# EAGLE board REGULADOR 5V y 9V (EAGLE 7.6.0)
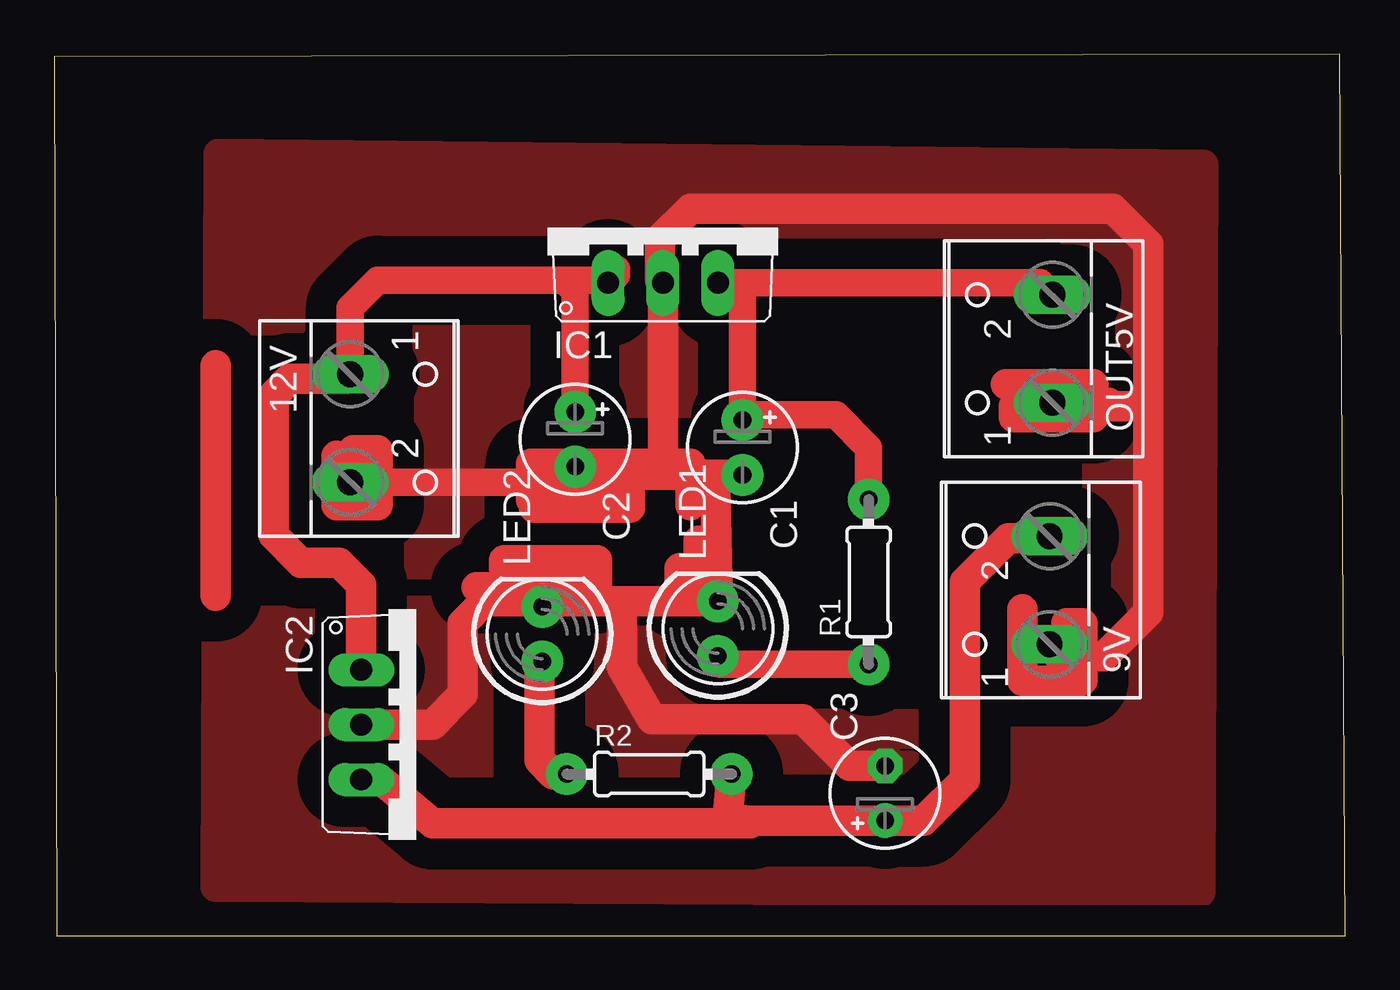
[diagram p0: board, top side]

Size 59.8 x 40.82 mm. Coordinates in mm from the lower left corner, seen from the top.
Outline: 0.13,0 59.8,0 59.54,40.82 0,40.69 0.13,0
Copper layers (1*16): Top 0.035mm / dielectric 1.5mm / Bottom 0.035mm
Design rules "default": minimum track width 10mil, minimum drill 24mil, track to track 8mil, track to pad 8mil, pad to pad 8mil, via to via 8mil, smd to smd 8mil, copper to edge 40mil, drill to drill 8mil, minimum pad ring 10mil, minimum via ring 8mil, stop-mask expansion 4mil, vias tented up to drill 0mil, thermal gap 10mil

## Footprints (pad centres in the part's own frame; a part is rotated, then mirrored left to right if it is on the bottom)
W237-102 = drill 1.194 long: 1 -2.5,-1.27; 2 2.5,-1.27
E2,5-5 = drill 0.813 pad 1.6: + -1.27,0 | drill 0.813 pad 1.6 octagon: - 1.27,0
TO220V = drill 1.016 long: 1 -2.54,-2.54; 2 0,-2.54; 3 2.54,-2.54
LED5MM = drill 0.813 octagon: A -1.27,0; K 1.27,0
0204/7 = drill 0.813 octagon: 1 -3.81,0; 2 3.81,0

## Placement (x,y rotation side)
9V  [W237-102]  44.83,16 90 top
12V  [W237-102]  14.99,23.5 270 top
C1  100uf  [E2,5-5]  31.88,22.61 270 top
C2  100uf  [E2,5-5]  24.13,22.99 270 top
C3  100uf  [E2,5-5]  38.48,6.6 90 top
IC1  7805TV  [TO220V]  28.19,32.77 0 top
IC2  7805TV  [TO220V]  16.76,9.78 270 top
LED1  [LED5MM]  30.73,14.22 90 top
LED2  [LED5MM]  22.61,13.97 90 top
OUT5V  [W237-102]  44.96,27.18 90 top
R1  270  [0204/7]  37.72,16.38 90 top
R2  270  [0204/7]  27.56,7.49 0 top

## Library data of the parts
9V 12V OUT5V = con-wago-500; MPN: 237-102; OC_FARNELL: unknown; OC_NEWARK: 70K9898
C1-C3 R1 R2 = rcl
IC1 IC2 = linear
LED1 LED2 = led

## Nets
GND: 9V.1 12V.2 C1.- C2.- C3.- IC1.2 IC2.2 LED1.K LED2.K OUT5V.1
N$1: 12V.1 C2.+ IC1.1 IC2.1
N$2: C1.+ IC1.3 OUT5V.2 R1.2
N$5: LED1.A R1.1
N$12: 9V.2 C3.+ IC2.3 R2.2
N$13: LED2.A R2.1

## Tracks (layer width: path | path; a pad name or v marks a point on that pad's centre or on a via)
GND
  Top 1.27: 12V.2 23.41,21 C2.-
  Top 1.422: C1.- 30.61,21.34 | 28.07,21.34 23.75,21.34 23.41,21 | 28.07,21.34 28.19,21.46 IC1.2 28.07,30.35 28.07,32.26 29.46,33.66 49.02,33.66 50.67,32 50.67,24.26 | 30.61,21.34 LED1.K 26.29,15.49 | 30.61,21.34 28.07,21.34 | 46.52,12.95 48.64,12.95 50.67,14.99 50.67,24.26 | 48.81,24.68 OUT5V.1 46.39,24.51 50.42,24.51 50.67,24.26 | C3.- 36.83,7.87 34.67,10.03 27.69,10.03 26.29,12.45 26.29,15.49 | 23.62,15.49 LED2.K | 26.29,15.49 23.62,15.49 | 23.62,15.49 19.94,15.49 18.92,14.48 18.92,11.18 17.53,9.78 IC2.2
  pour Top (isolate 1.422): 7.62,36.19 53.21,35.69 53.09,2.03 7.49,2.29
N$1
  Top 1.27: 12V.1 13.72,29.08 14.99,30.35 23.62,30.35 | 23.62,30.35 25.53,30.35 26.04,30.86 26.04,30.61 IC1.1 | C2.+ 24.13,29.84 23.62,30.35
  Top 1.422: IC2.1 14.22,16.26 13.21,17.27 11.43,17.27 10.16,18.54 10.16,25.02 10.92,25.78 13.5,25.78 12V.1
N$2
  Top 1.27: R1.2 37.72,22.61 36.19,24.13 32.13,24.13 C1.+ 31.88,29.59 31.24,30.23 | IC1.3 31.24,30.23 | 31.24,30.23 45.68,30.23 OUT5V.2
N$3  (via drill 0.8 pad 1.93)
  other vias: 31.88,23.88
N$4  (via drill 0.8 pad 1.93)
  other vias: 30.73,12.95
N$5
  Top 1.27: R1.1 30.86,12.57 LED1.A
N$6  (via drill 0.8 pad 1.93)
  other vias: 31.88,21.34
N$7  (via drill 0.8 pad 1.93)
  other vias: 30.73,15.49
N$8  (via drill 0.8 pad 1.93)
  other vias: 24.13,21.72
N$9  (via drill 0.8 pad 1.93)
  other vias: 24.13,24.26
N$10  (via drill 0.8 pad 1.93)
  other vias: 37.72,20.19
N$11  (via drill 0.8 pad 1.93)
  other vias: 37.72,12.57
N$12
  Top 1.422: 9V.2 46.01,18.41 44.2,18.41 42.16,16.38 42.16,7.24 40.26,5.33 C3.+ 32.51,5.33 31.18,5.4 | 31.18,5.4 R2.2 | IC2.3 15.11,7.24 17.53,5.21 32.26,5.21 31.18,5.4
N$13
  Top 1.422: R2.1 23.11,7.49 22.48,8.13 22.48,12.57 LED2.A
N$14  (via drill 0.7 pad 1.93)
  other vias: 23.75,7.49
N$15  (via drill 0.7 pad 1.93)
  other vias: 22.61,12.7
N$16  (via drill 0.7 pad 1.93)
  other vias: 31.37,7.49
N$17  (via drill 0.7 pad 1.93)
  other vias: 22.61,15.24
N$18
  Top 1.422: 21.97,21.08 26.67,21.08 26.67,19.81 22.22,19.81 22.22,20.19 22.1,20.19 22.1,21.84 29.46,21.84 29.46,19.94
N$19
  Top 1.422: 29.97,18.29 29.85,18.29 29.85,15.88 28.96,15.88 28.96,17.02
N$20
  Top 1.422: 19.56,16.13 25.15,16.13 25.15,17.4 20.83,17.4 20.83,17.02
N$21
  Top 1.422: 46.86,14.48 47.62,14.48 47.62,11.81 44.83,11.81 44.83,15.11
N$22
  Top 1.422: 44.07,25.53 48.13,25.53 48.13,24 44.45,24 44.45,24.51
N$23
  Top 1.422: 13.84,22.48 14.99,22.48 14.99,19.94 13.08,19.94 13.08,22.22
N$24
  Top 1.422: 7.49,26.42 7.49,15.75